# Altium PCB H-bridge.PcbDoc
Units mil, origin at the board's own origin, x right, y up, seen from the top; angles counter-clockwise.
Board outline 1715 x 2495 mil, 2 copper layers (Top Layer, Bottom Layer); 49 components, 26 nets, 127 pads, 0 vias.
Unrouted connection lines stored in the file: 97.
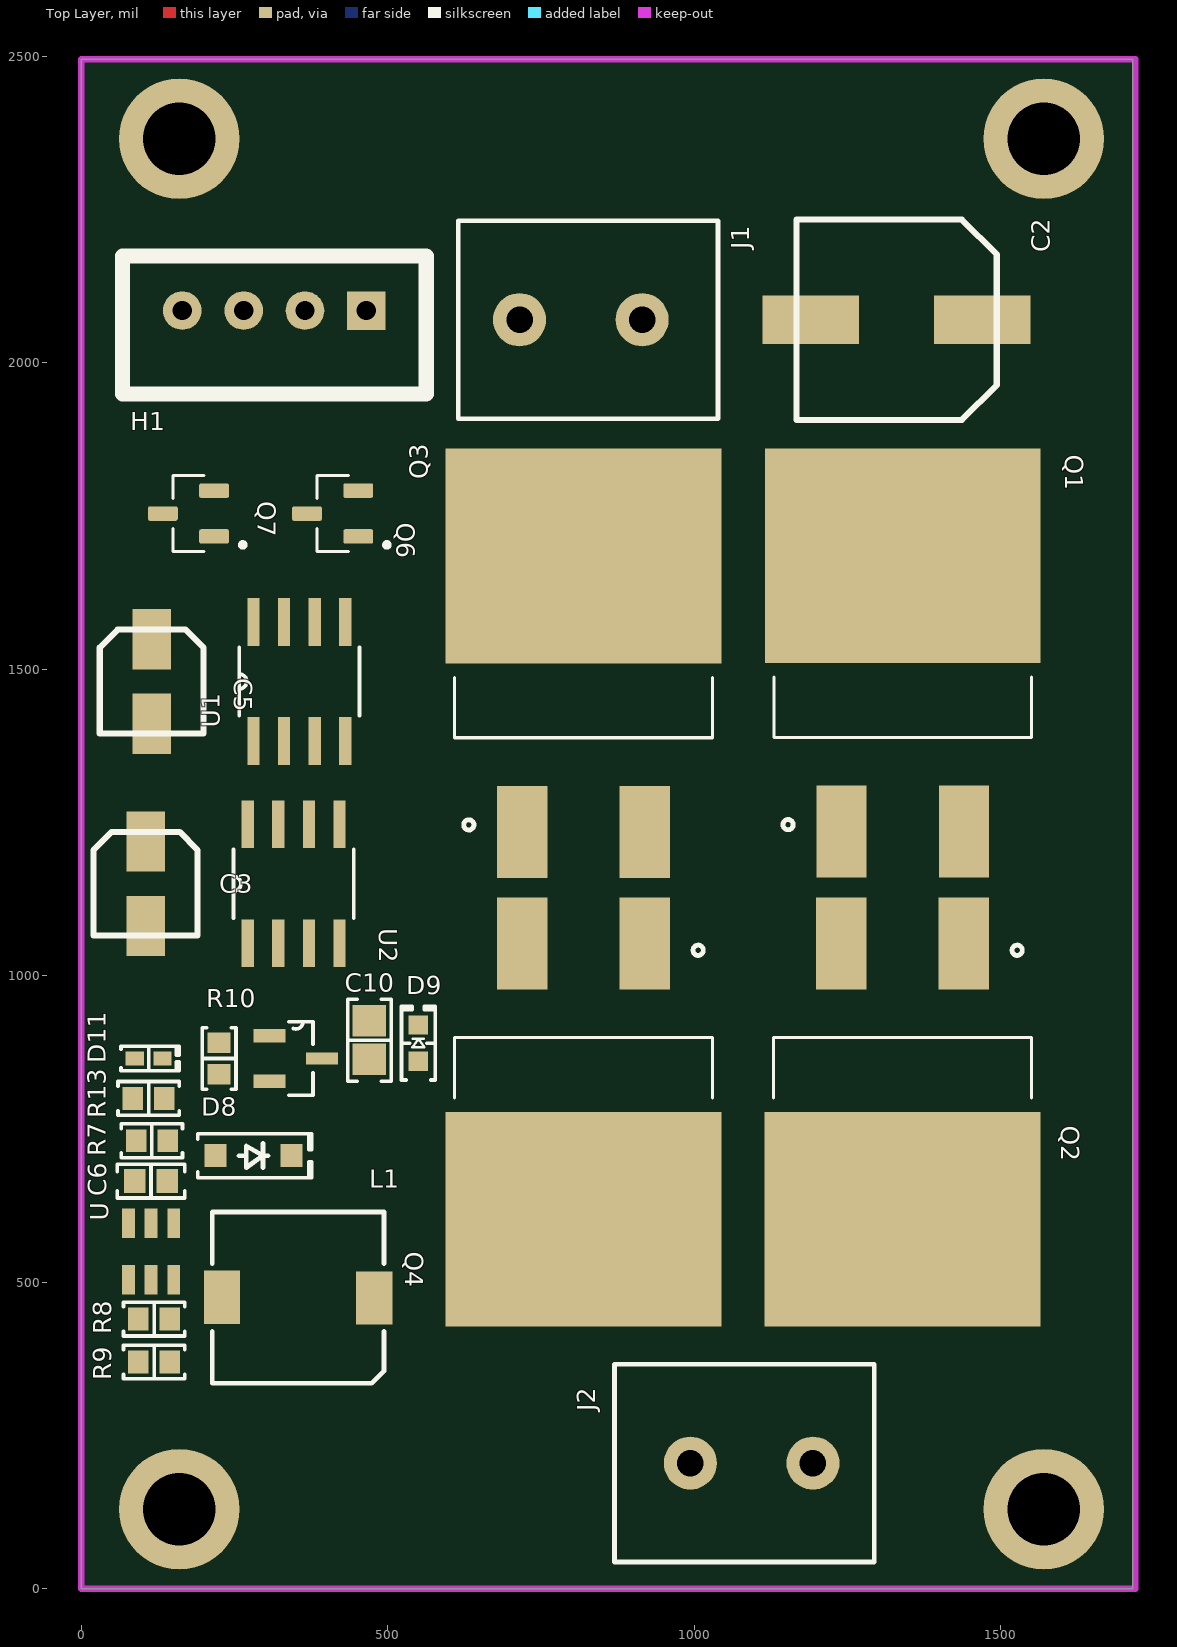
[diagram p0: Top Layer view]
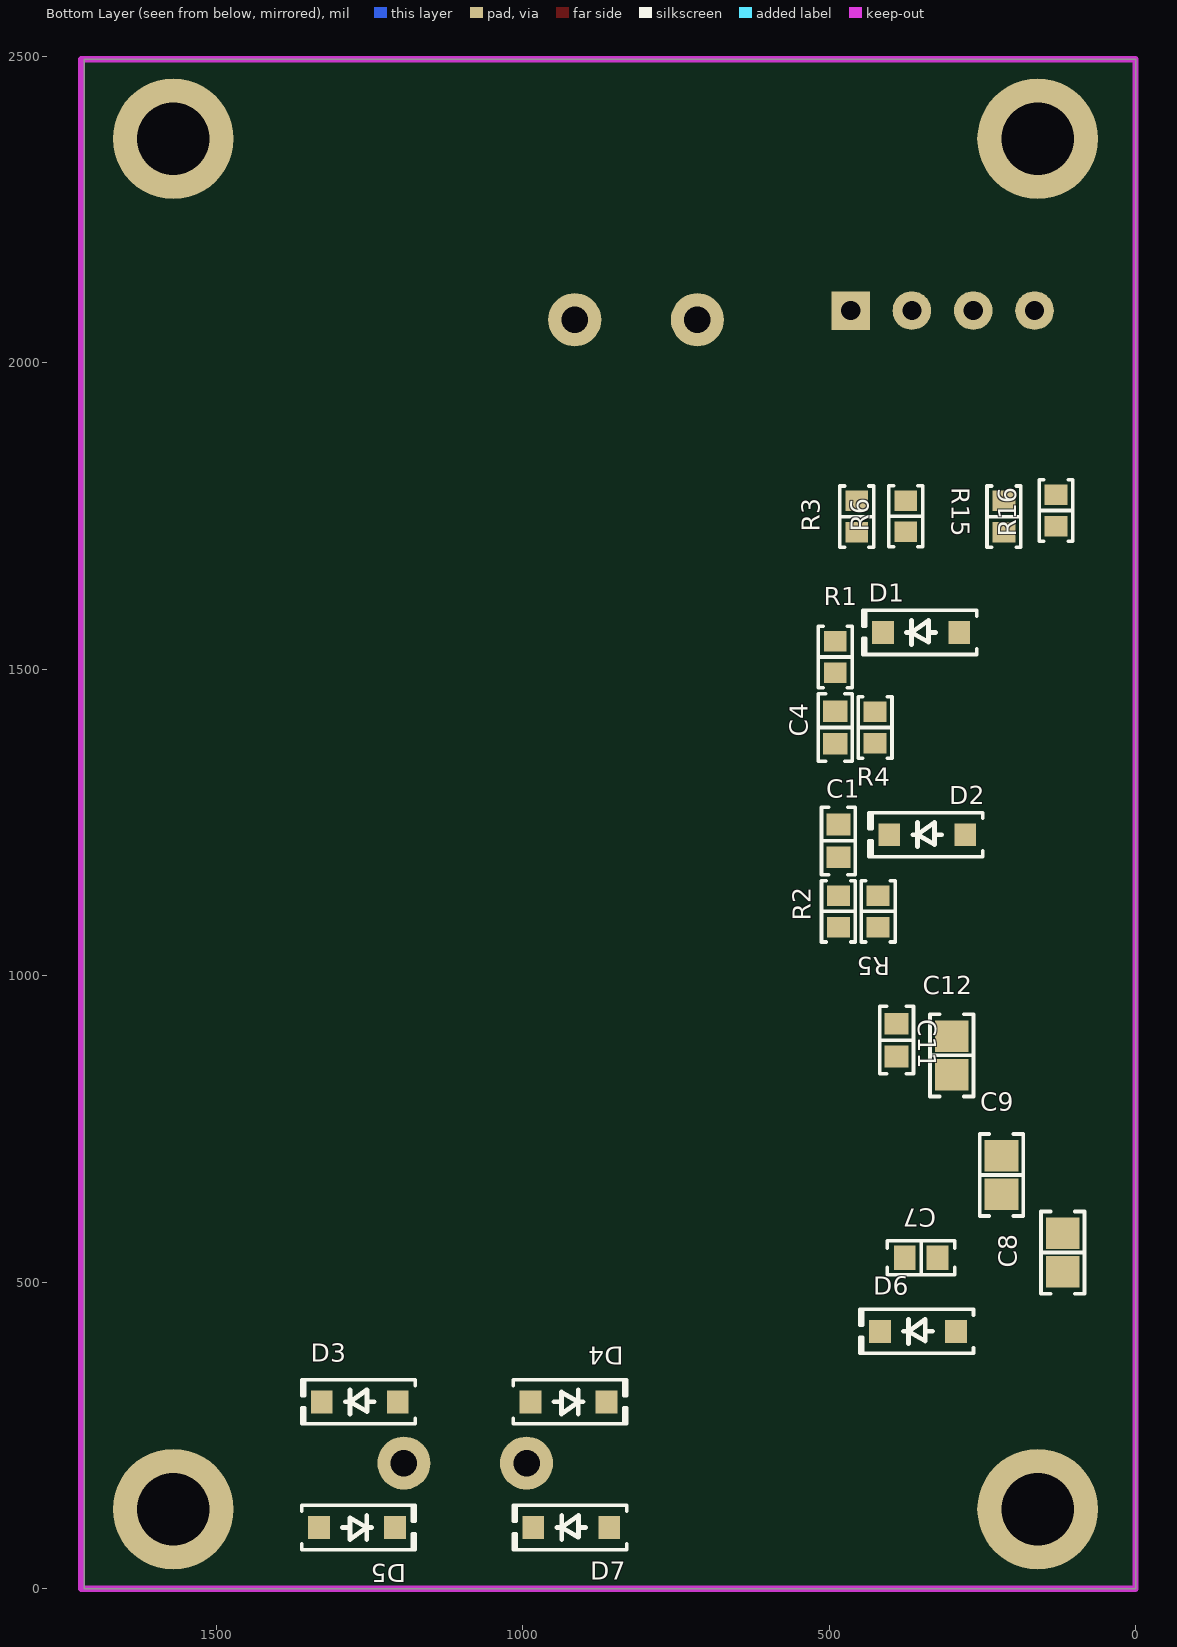
[diagram p1: Bottom Layer view, seen from below]

## Layer stack, top to bottom
Top Solder: solder mask 0.4, Solder Resist, Dk 3.5
Top Layer: signal copper 1.4
Dielectric 1: dielectric 12.6, FR-4, Dk 4.8
Bottom Layer: signal copper 1.4
Bottom Solder: solder mask 0.4, Solder Resist, Dk 3.5

## Board outline
0,0 0,2495 1715,2495 1715,0

## Design rules (kind name [scope] priority, off if disabled: settings)
Clearance [All] p1: gap=10 ignorepadtopadclearanceinfootprint=FALSE except(0: Arc-Hole Track-Hole SMDPad-Hole THPad-Hole Via-Hole Fill-Hole Poly-Hole Region-Hole Text-Hole)
PolygonConnect [All] p1: connectstyle=Relief reliefconductorwidth=10 reliefentries=4 polygonreliefangle="90 Angle" airgapwidth=10
RoutingVias [All] p1: holewidth=28 width=50 viastyle="Through Hole" minholewidth=28 minwidth=50 maxholewidth=28 maxwidth=50
SolderMaskExpansion [All] p1: expansion=4 istentingtop=FALSE
Width [All] p1: maxlimit=50 minlimit=10 preferedwidth=10 minimp=50.000000 maximp=50.000000 favimp=50.000000
30 further rules are at their usual default settings.

## Classes and differential pairs
component class Power: C6 C7 C8 C9 C10 C11 C12 D6 D8 D11 L1 R7 R8 R9 R13 U
component class H_Bridge_Mosate: A C1 C2 C3 C4 C5 D1 D2 D3 D4 D5 D7 H1 J1 J2 Q1 Q2 Q3 Q4 Q6 Q7 R1 R2 R3 R4 R5 R6 R15 R16 U1 U2

## Components (designator, comment, footprint, x,y, rotation, side; value= is the part's Value field where it differs from the comment)
C1 "1 µF" "CAP 0603_1608" 485,1219.99 r90 bottom
C2 "220uF" "tu nhom 8 (f)" 1330,2069.99 r180 top
C3 "4.7uF" "tu nhom 4 (b)" 105,1149.99 r270 top
C4 "1 µF" "CAP 0603_1608" 490,1404.99 r90 bottom
C5 "4.7uF" "tu nhom 4 (b)" 115,1479.99 r270 top
C6 "10000 pF" "CAP 0603_1608" 113.9,664.99 r0 top
C7 "10000 pF" "CAP 0603_1608" 350,540 r180 bottom
C8 "10 µF" "CAP 0805_2012" 118.9,548.49 r90 bottom
C9 "22 µF" "CAP 0805_2012" 218.9,674.99 r90 bottom
C10 "10 µF" "CAP 0805_2012" 470,895 r270 top
C11 "0.1µF" "CAP 0603_1608" 390,895 r270 bottom
C12 "10 µF" "CAP 0805_2012" 300,870 r270 bottom
D1 "1N5819HW-7-F" SOD-123 350,1559.99 r0 bottom
D2 "1N5819HW-7-F" SOD-123 340,1229.99 r0 bottom
D3 "1N5819HW-7-F" SOD-123 1265.55,305 r0 bottom
D4 "1N5819HW-7-F" SOD-123 925,305 r180 bottom
D5 "1N5819HW-7-F" SOD-123 1270,100 r180 bottom
D6 "1N5819HW-7-F" SOD-123 355,420 r0 bottom
D7 "1N5819HW-7-F" SOD-123 920.55,100 r0 bottom
D8 "1N5819HW-7-F" SOD-123 280.91,706.49 r0 top
D9 "Yellow" "LED 0603_1608 YELLOW" 550,890 r90 top
D11 "Green" "LED 0402_1005 GREEN" 110,865 r0 top
H1 "Header 4P 2.54 Duc Thang" XH2.54M-4 465,2084.99 r180 top
J1 "282837-2" "TE 282837-2" 815,2069.99 r0 top
J2 "282837-2" "TE 282837-2" 1093.6,205 r180 top
L1 "10µH" "TDK SLF7032" 353.9,474.99 r180 top
Q1 "IRF3205SPBF" TRANS_IRF3205SPBF 1339.99,1516.1 r0 top
Q2 "IRF3205SPBF" TRANS_IRF3205SPBF 1339.73,771.84 r180 top
Q3 "IRF3205SPBF" TRANS_IRF3205SPBF 819.28,1515.73 r0 top
Q4 "IRF3205SPBF" TRANS_IRF3205SPBF 819.28,771.84 r180 top
Q6 "BSS138" SOT95P240X111-3N 410,1753.9 r180 top
Q7 "BSS138" SOT95P240X111-3N 175,1753.9 r180 top
R1 "10 Ohms" "RES 0603_1608" 490,1519.99 r270 bottom
R2 "10 Ohms" "RES 0603_1608" 485,1104.99 r90 bottom
R3 "10 kOhms" "RES 0603_1608" 455,1748.9 r270 bottom
R4 "10 Ohms" "RES 0603_1608" 425,1404.99 r270 bottom
R5 "10 Ohms" "RES 0603_1608" 420,1104.99 r90 bottom
R6 "10 kOhms" "RES 0603_1608" 375,1749.49 r90 bottom
R7 "52.3 kOhms" "RES 0603_1608" 115.28,730.86 r0 top
R8 "100 kOhms" "RES 0603_1608" 118.9,439.99 r180 top
R9 "10 kOhms" "RES 0603_1608" 118.9,369.99 r0 top
R10 "680 Ohms" "RES 0603_1608" 225,865 r270 top
R13 "1 kOhms" "RES 0603_1608" 110,800 r0 top
R15 "10 kOhms" "RES 0603_1608" 215,1748.9 r270 bottom
R16 "10 kOhms" "RES 0603_1608" 130,1758.9 r270 bottom
U "LM2734YMK" SOT95P285X100-6N 113.9,549.99 r90 top
U1 "IR2104SPBF" SOIC127P600X175-8N 355.86,1479.99 r90 top
U2 "IR2104SPBF" SOIC127P600X175-8N 346.5,1149.99 r90 top
? "MCP1700T-3302E/TT" SOT95P237X112-3N 350,865 r0 top

## Footprints (in the part's own frame and the unit in brackets; to place one, negate y for a bottom-side part, rotate by r counter-clockwise, add the part's x,y. Pads: shape width x height; smd on the part's side, far side on the other; paste and mask are expansions set on the pad)
"CAP 0603_1608" [mm] "Chip Capacitor, 2-Leads, Body 1.60x0.80mm, IPC Medium Density"
  rect 0.9x1 smd: 1(-0.675,0) 2(0.675,0)
  silkscreen extent -1.4,-0.7 1.4,0.7, body extent -0.8,-0.41 0.8,0.41, height 0.82
"CAP 0805_2012" [mm] "Chip Capacitor, 2-Leads, Body 2.00x1.20mm, IPC Medium Density"
  rect 1.3x1.4 smd: 1(-0.8,0) 2(0.8,0)
  silkscreen extent -1.7,-0.9 1.7,0.9, body extent -1,-0.64 1,0.64, height 1.26
"LED 0402_1005 GREEN" [mm] "Chip Diode, 2-Leads, Body 1.00x0.50mm, IPC Medium Density"
  rect 0.75x0.6 smd: 1(-0.575,0) 2(0.575,0)
  silkscreen extent -1.14,-0.51 1.27,0.51, body extent -0.5,-0.25 0.5,0.25, height 0.21
"LED 0603_1608 YELLOW" [mm] "Chip Diode, 2-Leads, Body 1.60x0.80mm, IPC Medium Density"
  rect 0.8x0.8 smd: 1(-0.75,0) 2(0.75,0)
  silkscreen extent -1.52,-0.7 1.52,0.7, body extent -0.8,-0.4 0.8,0.4, height 0.53
"RES 0603_1608" [mm] "Chip Resistor, 2-Leads, Body 1.60x0.80mm, IPC Medium Density"
  rect 0.85x0.95 smd: 1(-0.65,0) 2(0.65,0)
  silkscreen extent -1.27,-0.7 1.27,0.7, body extent -0.8,-0.4 0.8,0.4, height 0.45
SOD-123 [mm] "SOD, 2-Leads, Body 1.55x3.70mm, IPC Medium Density"
  rect 0.9x0.95 smd: 1(-1.575,0) 2(1.575,0)
  silkscreen extent -2.3,-0.92 2.41,0.92, body extent -1.86,-0.78 1.86,0.77, height 1.35
SOIC127P600X175-8N [mil]
  rect 78x20 smd: 1(-97,75) 2(-97,25) 3(-97,-25) 4(-97,-75) 5(97,-75) 6(97,-25) 7(97,25) 8(97,75)
  silkscreen extent -56,-98 56,98
SOT95P237X112-3N [mil]
  rect 52x22 smd: 1(-43,37) 2(-43,-37)
  rect 52x20 smd: 3(43,0)
  silkscreen extent -11,-60 28,60
SOT95P240X111-3N [mm]
  rrect25% 1.23x0.6 smd: 1(-1.06,0.95) 2(-1.06,-0.95) 3(1.06,0)
  silkscreen extent -2.35,-1.57 0.65,1.57, body extent -1.2,-1.46 1.2,1.46, height 1.2
SOT95P285X100-6N [mil]
  rect 48x21 smd: 1(-46,37) 2(-46,0) 3(-46,-37) 4(46,-37) 5(46,0) 6(46,37)
"TDK SLF7032" [mm] "Power Inductor, 2-Leads, TDK, SLF7032T-221MR29-2PF"
  rect 1.5x2.2 smd: 1(-3.15,0.012) 2(3.15,-0.012)
  silkscreen extent -3.56,-3.55 3.56,3.55, body extent -3.56,-3.56 3.56,3.54, height 3.39
"TE 282837-2" [mm] "Wire to Board Terminal Block Horizontal with Board, 2 Postions, Body 10.76x8.2 mm, Pitch 5.08mm"
  round 2.2 hole 1.1: 1(-2.54,0) 2(2.54,0)
  silkscreen extent -5.08,-4.1 5.68,4.1, body extent -5.08,-4.1 5.68,4.1, height 10.3
TRANS_IRF3205SPBF [mil]
  rect 81.89x150 smd: 1(-100,-281.1) 3(100,-281.1)
  rect 450x350 smd: 2(0,168.9)
  silkscreen extent -210,-278 210,-29
"tu nhom 4 (b)" [mm]
  rect 2.5x1.6 smd: 1(-1.75,0) 2(1.75,0)
  silkscreen extent -2.15,-2.15 2.15,2.15, body extent -2.31,-2.15 2.29,2.15, height 3.91
"tu nhom 8 (f)" [mm]
  rect 4x2 smd: 1(-3.55,0) 2(3.55,0)
  silkscreen extent -4.15,-4.15 4.15,4.15, body extent -4.85,-4.25 4.85,4.25, height 10.5
XH2.54M-4 [mm]
  rect 1.6x1.6 hole 0.8: 1(0,0)
  round 1.6 hole 0.8: 2(2.54,0) 3(5.08,0) 4(7.62,0)
  silkscreen extent -2.48,-2.26 10.1,3.46, body extent -2.48,-2.26 10.1,3.48, height 6.91

## Part data
C1 C4: library part GCG188L8EE105KA07D, "CAP CER 1UF 16V X8L 0603", Device Package="0603 (1608 Metric)", manufacturer="Murata Electronics", Operating Temperature="-55°C ~ 150°C", Ratings=AEC-Q200, Supplier Part Number 1=490-GCG188L8EE105KA07DCT-ND, Temperature Coefficient=X8L, Tolerance=±10%, Voltage - Rated=16V, Applications=Automotive, Capacitance="1 µF", componentlink2description="DigiKey Link", componentlink2url=https://www.digikey.com/en/products/detail/murata-electronics/GCG188L8EE105KA07D/10695125, Features="Epoxy Mountable", lastupdated="2/9/2024 8:09:54 PM", Lifecycle Status=Active, Minimum Order=1, Mounting Type="Surface Mount, MLCC", Package / Case="0603 (1608 Metric)", packaging=TapeAndReel, Part Number=GCG188L8EE105KA07D, Part Status=Active, partid=46174, Price=0.04, series=GCG, Size / Dimension="0.063\" L x 0.031\" W (1.60mm x 0.80mm)", Supplier 1=DigiKey, Thickness (Max)="0.035\" (0.90mm)"
C2: library part "Tu Nhom 220uF 25V", "Dán", Chung_Loai=Dán, Don_Vi=Con, Ma_Hang=MH002221, So_Chan=2, Ten_Linh_Kien="Tụ Nhôm 220uF 25V"
C3 C5: library part "Tu Nhom 4.7uF 25V", "Dán", Chung_Loai=Dán, Don_Vi=Con, Ma_Hang=MH003790, So_Chan=2, Ten_Linh_Kien="Tụ Nhôm 4.7uF 25V 4x4.5MM"
C6 C7: library part C0603C103K4RECAUTO, "CAP CER 0603 10NF 16V X7R 10%", Device Package="0603 (1608 Metric)", manufacturer=KEMET, Operating Temperature="-55°C ~ 125°C", Ratings=AEC-Q200, Supplier Part Number 1=399-17880-1-ND, Temperature Coefficient=X7R, Tolerance=±10%, Voltage - Rated=16V, Applications="Automotive, ESD Protection", Capacitance="10000 pF", componentlink1description=Datasheet, componentlink1url=https://api.kemet.com/component-edge/download/datasheet/C0603C103K4RECAUTO.pdf, componentlink2description="DigiKey Link", componentlink2url=https://www.digikey.com/en/products/detail/kemet/C0603C103K4RECAUTO/8640474, lastupdated="2/9/2024 8:10:22 PM", Lifecycle Status=Active, Minimum Order=1, Mounting Type="Surface Mount, MLCC", Package / Case="0603 (1608 Metric)", packaging=TapeAndReel, Part Number=C0603C103K4RECAUTO, Part Status=Active, partid=8251, Price=0.01, series="ESD SMD Auto X7R", Size / Dimension="0.063\" L x 0.031\" W (1.60mm x 0.80mm)", Supplier 1=DigiKey, Thickness (Max)="0.034\" (0.87mm)"
C8: library part CL21X106KAYNNNE, "CAP CER 10UF 25V X6S 0805", Device Package="0805 (2012 Metric)", manufacturer="Samsung Electro-Mechanics", Operating Temperature="-55°C ~ 105°C", Supplier Part Number 1=1276-6698-1-ND, Temperature Coefficient=X6S, Tolerance=±10%, Voltage - Rated=25V, Applications="General Purpose", Capacitance="10 µF", componentlink1description=Datasheet, componentlink1url=http://www.samsungsem.com/kr/support/product-search/mlcc/CL21X106KAYNNNE.jsp, componentlink2description="DigiKey Link", componentlink2url=https://www.digikey.com/en/products/detail/samsung-electro-mechanics/CL21X106KAYNNNE/5961182, lastupdated="2/9/2024 8:16:03 PM", Lifecycle Status=Active, Minimum Order=1, Mounting Type="Surface Mount, MLCC", Package / Case="0805 (2012 Metric)", packaging=TapeAndReel, Part Number=CL21X106KAYNNNE, Part Status=Active, partid=4781, Price=0.04, series=CL, Size / Dimension="0.079\" L x 0.049\" W (2.00mm x 1.25mm)", Supplier 1=DigiKey, Thickness (Max)="0.057\" (1.45mm)"
C9: library part CL21A226KQQNNNE, "CAP CER 22UF 6.3V X5R 0805", Device Package="0805 (2012 Metric)", manufacturer="Samsung Electro-Mechanics", Operating Temperature="-55°C ~ 85°C", Supplier Part Number 1=1276-2907-1-ND, Temperature Coefficient=X5R, Tolerance=±10%, Voltage - Rated=6.3V, Applications="General Purpose", Capacitance="22 µF", componentlink1description=Datasheet, componentlink1url=http://www.samsungsem.com/kr/support/product-search/mlcc/CL21A226KQQNNNE.jsp, componentlink2description="DigiKey Link", componentlink2url=https://www.digikey.com/en/products/detail/samsung-electro-mechanics/CL21A226KQQNNNE/3888565, lastupdated="2/9/2024 8:16:07 PM", Lifecycle Status=Active, Minimum Order=1, Mounting Type="Surface Mount, MLCC", Package / Case="0805 (2012 Metric)", packaging=TapeAndReel, Part Number=CL21A226KQQNNNE, Part Status=Active, partid=3051, Price=0.03, series=CL, Size / Dimension="0.079\" L x 0.049\" W (2.00mm x 1.25mm)", Supplier 1=DigiKey, Thickness (Max)="0.055\" (1.40mm)"
C10 C12: library part C2012X6S1C106K125AC, "CAP CER 10UF 16V X6S 0805", Device Package="0805 (2012 Metric)", manufacturer="TDK Corporation", Operating Temperature="-55°C ~ 105°C", Supplier Part Number 1=445-7611-1-ND, Temperature Coefficient=X6S, Tolerance=±10%, Voltage - Rated=16V, Applications="General Purpose", Capacitance="10 µF", componentlink1description=Datasheet, componentlink1url=https://product.tdk.com/info/en/catalog/datasheets/mlcc_commercial_general_en.pdf?ref_disty=digikey, componentlink2description="DigiKey Link", componentlink2url=https://www.digikey.com/en/products/detail/tdk-corporation/C2012X6S1C106K125AC/2733046, Features="Low ESL", lastupdated="2/9/2024 8:16:08 PM", Lifecycle Status=Active, Minimum Order=1, Mounting Type="Surface Mount, MLCC", Package / Case="0805 (2012 Metric)", packaging=TapeAndReel, Part Number=C2012X6S1C106K125AC, Part Status=Active, partid=2995, Price=0.06, series=C, Size / Dimension="0.079\" L x 0.049\" W (2.00mm x 1.25mm)", Supplier 1=DigiKey, Thickness (Max)="0.057\" (1.45mm)"
C11: library part 0603YC104K4T4A, "CAP CER 0.1UF 16V X7R 0603", Device Package="0603 (1608 Metric)", manufacturer="AVX Corporation", Operating Temperature="-55°C ~ 125°C", Ratings=AEC-Q200, Supplier Part Number 1=478-9382-1-ND, Temperature Coefficient=X7R, Tolerance=±10%, Voltage - Rated=16V, Applications=Automotive, Capacitance=0.1µF, componentlink1description=Datasheet, componentlink1url=http://datasheets.avx.com/AutoMLCC.pdf, componentlink2description="DigiKey Link", componentlink2url=http://digikey.com/product-detail/en/avx-corporation/0603YC104K4T4A/478-9382-1-ND/4901449, lastupdated="9/2/2020 1:03:04 AM", Lifecycle Status=Active, Minimum Order=1, Mounting Type="Surface Mount, MLCC", Package / Case="0603 (1608 Metric)", packaging=TapeAndReel, Part Number=0603YC104K4T4A, Part Status=Active, partid=17140, Price=0.02, series=-, Size / Dimension="0.063\" L x 0.032\" W (1.60mm x 0.81mm)", Supplier 1=DigiKey, Thickness (Max)="0.035\" (0.90mm)"
D1 D2 D3 D4 D5 D6 D7 D8: "DIODE SCHOTTKY 40V 1A SOD123", Capacitance @ Vr, F="60pF @ 4V, 1MHz", Current - Average Rectified (Io)=1A, Current - Reverse Leakage @ Vr="1 mA @ 40 V", manufacturer="Diodes Incorporated", Operating Temperature - Junction="-65°C ~ 125°C", Package / Case=SOD-123, Supplier Part Number 1=1N5819HW-FDICT-ND, Voltage - DC Reverse (Vr) (Max)="40 V", Voltage - Forward (Vf) (Max) @ If="450 mV @ 1 A", componentlink1description=Datasheet, componentlink1url=https://www.diodes.com/assets/Datasheets/ds30217.pdf, componentlink2description="DigiKey Link", componentlink2url=https://www.digikey.com/en/products/detail/diodes-incorporated/1N5819HW-7-F/814970, Diode Type=Schottky, lastupdated="6/3/2024 7:54:46 PM", Lifecycle Status=Active, Minimum Order=1, Mounting Type="Surface Mount", packaging=TapeAndReel, Part Number=1N5819HW-7-F, Part Status=Active, partid=2212, Price=0.05, series=-, Speed="Fast Recovery =< 500ns, > 200mA (Io)", Supplier 1=DigiKey, Supplier Device Package=SOD-123
D9: library part IN-S63AT5Y, "LED YELLOW CLEAR 0603 SMD", Current - Test=5mA, Device Package="0603 (1608 Metric)", Lens Color=Clear, manufacturer=Inolux, Millicandela Rating=35mcd, Supplier Device Package=0603, Supplier Part Number 1=1830-1066-1-ND, Voltage - Forward (Vf) (Typ)=2V, Color=Yellow, componentlink1description=Datasheet, componentlink1url=http://www.inolux-corp.com/datasheet/SMDLED/Mono%20Color%20Top%20View/IN-S63AT%20Series_V1.1.pdf, componentlink2description="DigiKey Link", componentlink2url=https://www.digikey.com/en/products/detail/inolux/IN-S63AT5Y/7604932, Configuration=Standard, Height (Max)=0.40mm, lastupdated="6/3/2024 8:01:09 PM", Lens Size="1.15mm x 0.80mm", Lens Style="Rectangle with Flat Top", Lens Transparency=Clear, Lifecycle Status=Active, Minimum Order=1, Mounting Type="Surface Mount", Package / Case="0603 (1608 Metric)", packaging=TapeAndReel, Part Number=IN-S63AT5Y, Part Status=Active, partid=143, Price=0.03, series=IN-S63AT, Size / Dimension="1.60mm L x 0.80mm W", Supplier 1=DigiKey, Viewing Angle=120°, Wavelength - Dominant=589nm, Wavelength - Peak=593nm
D11: library part QBLP595-AG15-2897, "LED GREEN CLEAR 0402 SMD", Current - Test=5mA, Device Package="0402 (1005 Metric)", Lens Color=Colorless, manufacturer="QT Brightek (QTB)", Millicandela Rating=16.5mcd, Supplier Device Package=0402, Supplier Part Number 1=1516-QBLP595-AG15-2897CT-ND, Voltage - Forward (Vf) (Typ)=1.9V, Color=Green, componentlink1description=Datasheet, componentlink1url=https://www.qt-brightek.com/datasheet/QBLP595-AG15-2897.pdf, componentlink2description="DigiKey Link", componentlink2url=https://www.digikey.com/en/products/detail/qt-brightek-qtb/QBLP595-AG15-2897/17049386, Configuration=Standard, Height (Max)=0.60mm, lastupdated="6/3/2024 7:58:13 PM", Lens Size="0.70mm x 0.50mm", Lens Style="Rectangle with Flat Top", Lens Transparency=Clear, Lifecycle Status=Active, Minimum Order=1, Mounting Type="Surface Mount", Package / Case="0402 (1005 Metric)", packaging=TapeAndReel, Part Number=QBLP595-AG15-2897, Part Status=Active, partid=1262, Price=0.04, series=QBLP595, Size / Dimension="1.00mm L x 0.50mm W", Supplier 1=DigiKey, Viewing Angle=140°, Wavelength - Dominant=570nm
H1: "Cắm", Chung_Loai=Cắm, Don_Vi=Con, Ma_Hang=MH001285, Ten_Linh_Kien="Header 4P XH2.54-4P Đực Thẳng"
J1 J2: "TERM BLK 2P SIDE ENT 5.08MM PCB", Color=Green, Current="13.5 A", manufacturer="TE Connectivity AMP Connectors", Supplier Part Number 1=A113320-ND, Voltage="300 V", componentlink1description=Datasheet, componentlink1url=https://www.te.com/commerce/DocumentDelivery/DDEController?Action=srchrtrv&DocNm=282837&DocType=Customer+Drawing&DocLang=English, componentlink2description="DigiKey Link", componentlink2url=https://www.digikey.com/en/products/detail/te-connectivity-amp-connectors/282837-2/2187973, Features="Interlocking (Side)", lastupdated="6/21/2022 3:00:23 PM", Lifecycle Status=Active, Mating Orientation="Horizontal with Board", Minimum Order=1, Mounting Type="Through Hole", Number of Levels=1, packaging=Tray, Part Number=282837-2, Part Status=Active, Pitch="0.200\" (5.08mm)", Positions Per Level=2, Price=0.31, series=Buchanan, Supplier 1=DigiKey, Wire Gauge="16-28 AWG", Wire Termination="Screw - Rising Cage Clamp"
L1: library part SLF7032T-100M1R4-2PF, "FIXED IND 10UH 1.4A 63.6 MOHM", Current Rating (Amps)=1.4A, DC Resistance (DCR)="63.6mOhm Max", Device Package=Nonstandard, Inductance Frequency - Test=100kHz, manufacturer="TDK Corporation", Operating Temperature="-40°C ~ 105°C", Supplier Part Number 1=445-1998-1-ND, Tolerance=±20%, componentlink1description=Datasheet, componentlink1url=//media.digikey.com/pdf/Data%20Sheets/TDK%20PDFs/SLF7032_Type.pdf, componentlink2description="DigiKey Link", componentlink2url=http://digikey.com/product-detail/en/tdk-corporation/SLF7032T-100M1R4-2PF/445-1998-1-ND/755405, Height - Seated (Max)="0.134\" (3.40mm)", Inductance=10µH, lastupdated="9/2/2020 1:30:24 AM", Lifecycle Status=Active, Material - Core=Ferrite, Minimum Order=1, Mounting Type="Surface Mount", Package / Case=Nonstandard, packaging=TapeAndReel, Part Number=SLF7032T-100M1R4-2PF, Part Status=Active, partid=3677, Price=0.43, series=SLF, Shielding=Shielded, Size / Dimension="0.276\" L x 0.276\" W (7.00mm x 7.00mm)", Supplier 1=DigiKey, Type=Wirewound
Q1 Q2 Q3 Q4: "RoHS Compliant", Package="D2PAK Infineon", Availability=Unavailable, MF="Infineon Technologies", MP=IRF3205SPBF, Price=None, SnapEDA_Link=https://www.snapeda.com/parts/IRF3205SPBF/Infineon%20Technologies/view-part/576468/?ref=snap
Q6 Q7: "N-Channel 50 V 220mA (Ta) 350mW (Ta) Surface Mount SOT-23-3", Package="SOT-23-3 Motorola", Check_prices=https://www.snapeda.com/parts/BSS138/Onsemi/view-part/?ref=eda, MF=onsemi, MP=BSS138, SnapEDA_Link=https://www.snapeda.com/parts/BSS138/Onsemi/view-part/?ref=snap
R1 R2 R4 R5: library part ERJ-UP3F10R0V, "RES 10 OHM 1% 1/4W 0603", Device Package="0603 (1608 Metric)", manufacturer="Panasonic Electronic Components", Operating Temperature="-55°C ~ 155°C", Power (Watts)="0.25W, 1/4W", Ratings=AEC-Q200, Supplier Device Package=0603, Supplier Part Number 1=10-ERJ-UP3F10R0VCT-ND, Temperature Coefficient=±100ppm/°C, Tolerance=±1%, componentlink1description=Datasheet, componentlink1url=https://b2b-api.panasonic.eu/file_stream/pids/fileversion/4484, componentlink2description="DigiKey Link", componentlink2url=https://www.digikey.com/en/products/detail/panasonic-electronic-components/ERJ-UP3F10R0V/12092098, Composition="Thick Film", Features="Anti-Sulfur, Automotive AEC-Q200, Pulse Withstanding", Height - Seated (Max)="0.022\" (0.55mm)", lastupdated="2/9/2024 8:41:13 PM", Lifecycle Status=Active, Minimum Order=1, Number of Terminations=2, Package / Case="0603 (1608 Metric)", packaging=TapeAndReel, Part Number=ERJ-UP3F10R0V, Part Status=Active, partid=66744, Price=0.02, Resistance="10 Ohms", series=ERJ-UP3, Size / Dimension="0.063\" L x 0.031\" W (1.60mm x 0.80mm)", Supplier 1=DigiKey
R3 R6 R15 R16: library part AC0603FR-0710KL, "RES SMD 10K OHM 1% 1/10W 0603", Device Package="0603 (1608 Metric)", manufacturer=Yageo, Operating Temperature="-55°C ~ 155°C", Power (Watts)="0.1W, 1/10W", Ratings=AEC-Q200, Supplier Device Package=0603, Supplier Part Number 1=311-10KLDCT-ND, Temperature Coefficient=±100ppm/°C, Tolerance=±1%, componentlink1description=Datasheet, componentlink1url=https://www.yageo.com/upload/media/product/productsearch/datasheet/rchip/PYu-AC_51_RoHS_L_7.pdf, componentlink2description="DigiKey Link", componentlink2url=https://www.digikey.com/en/products/detail/yageo/AC0603FR-0710KL/2827814, Composition="Thick Film", Features="Automotive AEC-Q200, Moisture Resistant", Height - Seated (Max)="0.022\" (0.55mm)", lastupdated="2/9/2024 8:42:48 PM", Lifecycle Status=Active, Minimum Order=1, Number of Terminations=2, Package / Case="0603 (1608 Metric)", packaging=CutTape, Part Number=AC0603FR-0710KL, Part Status=Active, partid=17347, Price=0.01, Resistance="10 kOhms", series=AC, Size / Dimension="0.063\" L x 0.031\" W (1.60mm x 0.80mm)", Supplier 1=DigiKey
R7: library part ERA-3AEB5232V, "RES SMD 52.3KOHM 0.1% 1/10W 0603", Device Package="0603 (1608 Metric)", manufacturer="Panasonic Electronic Components", Operating Temperature="-55°C ~ 155°C", Power (Watts)="0.1W, 1/10W", Ratings=AEC-Q200, Supplier Device Package=0603, Supplier Part Number 1=P52.3KDBCT-ND, Temperature Coefficient=±25ppm/°C, Tolerance=±0.1%, componentlink1description=Datasheet, componentlink1url=https://industrial.panasonic.com/cdbs/www-data/pdf/RDM0000/AOA0000C307.pdf, componentlink2description="DigiKey Link", componentlink2url=https://www.digikey.com/en/products/detail/panasonic-electronic-components/ERA-3AEB5232V/2026903, Composition="Thin Film", Features="Automotive AEC-Q200", Height - Seated (Max)="0.022\" (0.55mm)", lastupdated="2/9/2024 8:42:09 PM", Lifecycle Status=Active, Minimum Order=1, Number of Terminations=2, Package / Case="0603 (1608 Metric)", packaging=TapeAndReel, Part Number=ERA-3AEB5232V, Part Status=Active, partid=24659, Price=0.03, Resistance="52.3 kOhms", series=ERA-3A, Size / Dimension="0.063\" L x 0.031\" W (1.60mm x 0.80mm)", Supplier 1=DigiKey
R8: library part RCA0603100KJNEA, "RES SMD 100K OHM 5% 1/10W 0603", Device Package="0603 (1608 Metric)", manufacturer="Vishay Dale", Operating Temperature="-55°C ~ 155°C", Power (Watts)="0.1W, 1/10W", Ratings=AEC-Q200, Supplier Device Package=0603, Supplier Part Number 1=541-2215-1-ND, Temperature Coefficient=±200ppm/°C, Tolerance=±5%, componentlink1description=Datasheet, componentlink1url=http://www.vishay.com/docs/20037/rcae3.pdf, componentlink2description="DigiKey Link", componentlink2url=https://www.digikey.com/en/products/detail/vishay-dale/RCA0603100KJNEA/4946784, Composition="Thick Film", Features="Anti-Sulfur, Automotive AEC-Q200", Height - Seated (Max)="0.020\" (0.50mm)", lastupdated="2/9/2024 8:42:20 PM", Lifecycle Status=Active, Minimum Order=1, Number of Terminations=2, Package / Case="0603 (1608 Metric)", packaging=TapeAndReel, Part Number=RCA0603100KJNEA, Part Status=Active, partid=23468, Price=0.01, Resistance="100 kOhms", series=RCA, Size / Dimension="0.061\" L x 0.033\" W (1.55mm x 0.85mm)", Supplier 1=DigiKey
R9: library part TNPU060310K0BZEN00, "RES SMD 10K OHM 0.1% 1/10W 0603", Device Package="0603 (1608 Metric)", manufacturer="Vishay Dale", Operating Temperature="-55°C ~ 125°C", Power (Watts)="0.1W, 1/10W", Ratings=AEC-Q200, Supplier Device Package=0603, Supplier Part Number 1=TNPU10.0KBACT-ND, Temperature Coefficient=±5ppm/°C, Tolerance=±0.1%, componentlink1description=Datasheet, componentlink1url=http://www.vishay.com/docs/28779/tnpue3.pdf, componentlink2description="DigiKey Link", componentlink2url=https://www.digikey.com/en/products/detail/vishay-dale/TNPU060310K0BZEN00/2238348, Composition="Thin Film", Features="Anti-Sulfur, Automotive AEC-Q200, Moisture Resistant", Height - Seated (Max)="0.022\" (0.55mm)", lastupdated="2/9/2024 8:43:27 PM", Lifecycle Status=Active, Minimum Order=1, Number of Terminations=2, Package / Case="0603 (1608 Metric)", packaging=TapeAndReel, Part Number=TNPU060310K0BZEN00, Part Status=Active, partid=7183, Price=0.88, Resistance="10 kOhms", series="TNPU e3", Size / Dimension="0.063\" L x 0.033\" W (1.60mm x 0.85mm)", Supplier 1=DigiKey
R10: library part RT0603CRD07680RL, "RES SMD 680 OHM 0.25% 1/10W 0603", Device Package="0603 (1608 Metric)", manufacturer=Yageo, Operating Temperature="-55°C ~ 155°C", Power (Watts)="0.1W, 1/10W", Supplier Device Package=0603, Supplier Part Number 1=YAG4792CT-ND, Temperature Coefficient=±25ppm/°C, Tolerance=±0.25%, componentlink1description=Datasheet, componentlink1url=https://www.yageo.com/upload/media/product/productsearch/datasheet/rchip/PYu-RT_1-to-0.01_RoHS_L_11.pdf, componentlink2description="DigiKey Link", componentlink2url=http://digikey.com/product-detail/en/yageo/RT0603CRD07680RL/YAG4792CT-ND/6616948, Composition="Thin Film", Height - Seated (Max)="0.022\" (0.55mm)", lastupdated="2/9/2024 8:42:46 PM", Lifecycle Status=Active, Minimum Order=1, Number of Terminations=2, Package / Case="0603 (1608 Metric)", packaging=TapeAndReel, Part Number=RT0603CRD07680RL, Part Status=Active, partid=17637, Price=0.07, Resistance="680 Ohms", series=RT, Size / Dimension="0.063\" L x 0.031\" W (1.60mm x 0.80mm)", Supplier 1=DigiKey
R13: library part RN73R1JTTD1001B25, "RES 1K OHM 0.1% 1/10W 0603", Device Package="0603 (1608 Metric)", manufacturer="KOA Speer Electronics, Inc.", Operating Temperature="-55°C ~ 155°C", Power (Watts)="0.1W, 1/10W", Ratings=AEC-Q200, Supplier Device Package=0603, Supplier Part Number 1=2019-RN73R1JTTD1001B25CT-ND, Temperature Coefficient=±25ppm/°C, Tolerance=±0.1%, componentlink1description=Datasheet, componentlink1url=//media.digikey.com/pdf/Data%20Sheets/KOA%20Speer/RN73R_Type_DS.pdf, componentlink2description="DigiKey Link", componentlink2url=https://www.digikey.com/en/products/detail/koa-speer-electronics-inc/RN73R1JTTD1001B25/9991865, Composition="Thin Film", Features="Automotive AEC-Q200, Moisture Resistant", Height - Seated (Max)="0.022\" (0.55mm)", lastupdated="2/9/2024 8:43:22 PM", Lifecycle Status=Active, Minimum Order=1, Number of Terminations=2, Package / Case="0603 (1608 Metric)", packaging=TapeAndReel, Part Number=RN73R1JTTD1001B25, Part Status=Active, partid=8387, Price=0.05, Resistance="1 kOhms", series=RN73R, Size / Dimension="0.063\" L x 0.031\" W (1.60mm x 0.80mm)", Supplier 1=DigiKey
U: "Buck Switching Regulator IC Positive Adjustable 0.8V 1 Output 1A SOT-23-6 Thin, TSOT-23-6", Package="SOT-23 Texas Instruments", Availability=Unavailable, MF="Texas Instruments", MP=LM2734YMK, Price=None, SnapEDA_Link=https://www.snapeda.com/parts/LM2734YMK/Texas%20Instruments/view-part/105783/?ref=snap
U1 U2: "Floating channel designed for bootstrap operation", Package="SOIC-8 International Rectifier", Availability=Warning, Check_prices=https://www.snapeda.com/parts/IR2104SPBF/Infineon%20Technologies/view-part/61964/?ref=eda, MF=Infineon, MP=IR2104SPBF, Price=None, Purchase-URL=https://pricing.snapeda.com/search/part/IR2104SPBF/?ref=eda, SnapEDA_Link=https://www.snapeda.com/parts/IR2104SPBF/Infineon%20Technologies/view-part/61964/?ref=snap
?: "Linear Voltage Regulator IC 1 Output 250mA SOT-23-3", Package="SOT-23-3 Microchip", Availability=Unavailable, MF=Microchip, MP=MCP1700T-3302E/TT, Price=None, SnapEDA_Link=https://www.snapeda.com/parts/MCP1700T-3302E/TT/Microchip/view-part/50877/?ref=snap

## Free pads (board coordinates)
  round 196.85 hole 118.11: 9(160,130) 9(160,2365) 9(1570,130) 9(1570,2365)

## Nets (pads, with @x,y where several pads share a name; then routed paths per layer and width w, separated by ;. In a path a pad name is that pad's centre, name@x,y a point inside that pad or via, vN(x,y) a via of type N, cw(c..) or ccw(c..) an arc to the next point about the centre after c; other vN are vias at no path point)
+3.3: ?.2 C12.2 Q6.1 Q7.1 R3.2 R10.2 R15.2
+5: ?.3 C6.2 C9.2 C10.2 C11.2 D8.1 L1.2 R6.2 R7.2 R13.2 R16.2
+12: C2.1 C3.1 C5.1 C8.2 D1.1 D2.1 D3.2 D4.2 J1.1 Q1.2 Q3.2 R8.2 U1.1 U1.3 U2.1 U2.3 U.5
GND: ?.1 C2.2 C3.2 C5.2 C8.1 C9.1 C10.1 C11.1 C12.1 D5.1 D6.1 D7.1 D9.2 D11.2 H1.3 H1.4 J1.2 Q2.3 Q4.3 R9.1 U1.4 U2.4 U.2
NetC1_2: C1.2 D2.2 U2.6 U2.8
NetC4_2: C4.2 D1.2 U1.6 U1.8
NetC6_1: C6.1 R7.1 R9.2 U.3
NetC7_1: C7.1 D6.2 L1.1 U.6
NetC7_2: C7.2 D8.2 U.1
NetD9_1: D9.1 R10.1
NetD11_1: D11.1 R13.1
NetQ1_1: Q1.1 R2.1
NetQ2_1: Q2.1 R5.1
NetQ3_1: Q3.1 R1.2
NetQ4_1: Q4.1 R4.2
NetR1_1: R1.1 U1.7
NetR2_2: R2.2 U2.7
NetR4_1: R4.1 U1.5
NetR5_2: R5.2 U2.5
NetR8_1: R8.1 U.4
OUT1: C4.1 D4.1 D7.2 J2.2 Q3.3 Q4.2
OUT2: C1.1 D3.1 D5.2 J2.1 Q1.3 Q2.2
PWM1: Q6.3 R6.1 U1.2
PWM1_Sig: H1.1 Q6.2 R3.1
PWM2: Q7.3 R16.1 U2.2
PWM2_Sig: H1.2 Q7.2 R15.1

## Keep-outs
Keep-Out Layer:
  lines w10: 0,0 0,2495 1720,2495 1720,0 0,0